# EAGLE board P007_AmanPandey_Headphone (EAGLE 9.6.2)
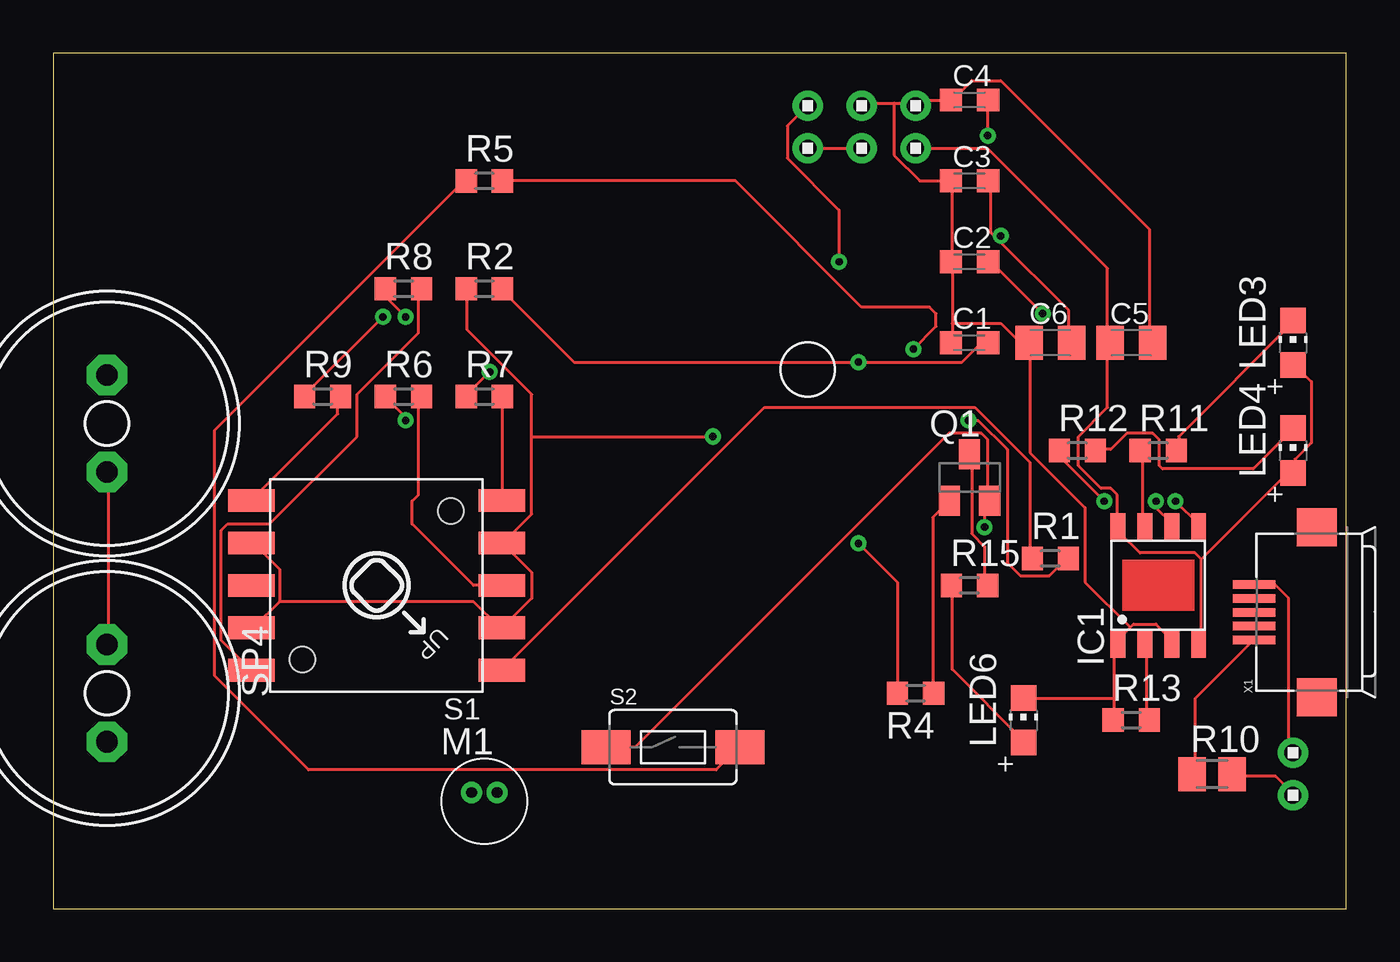
[diagram p0: board, top side]
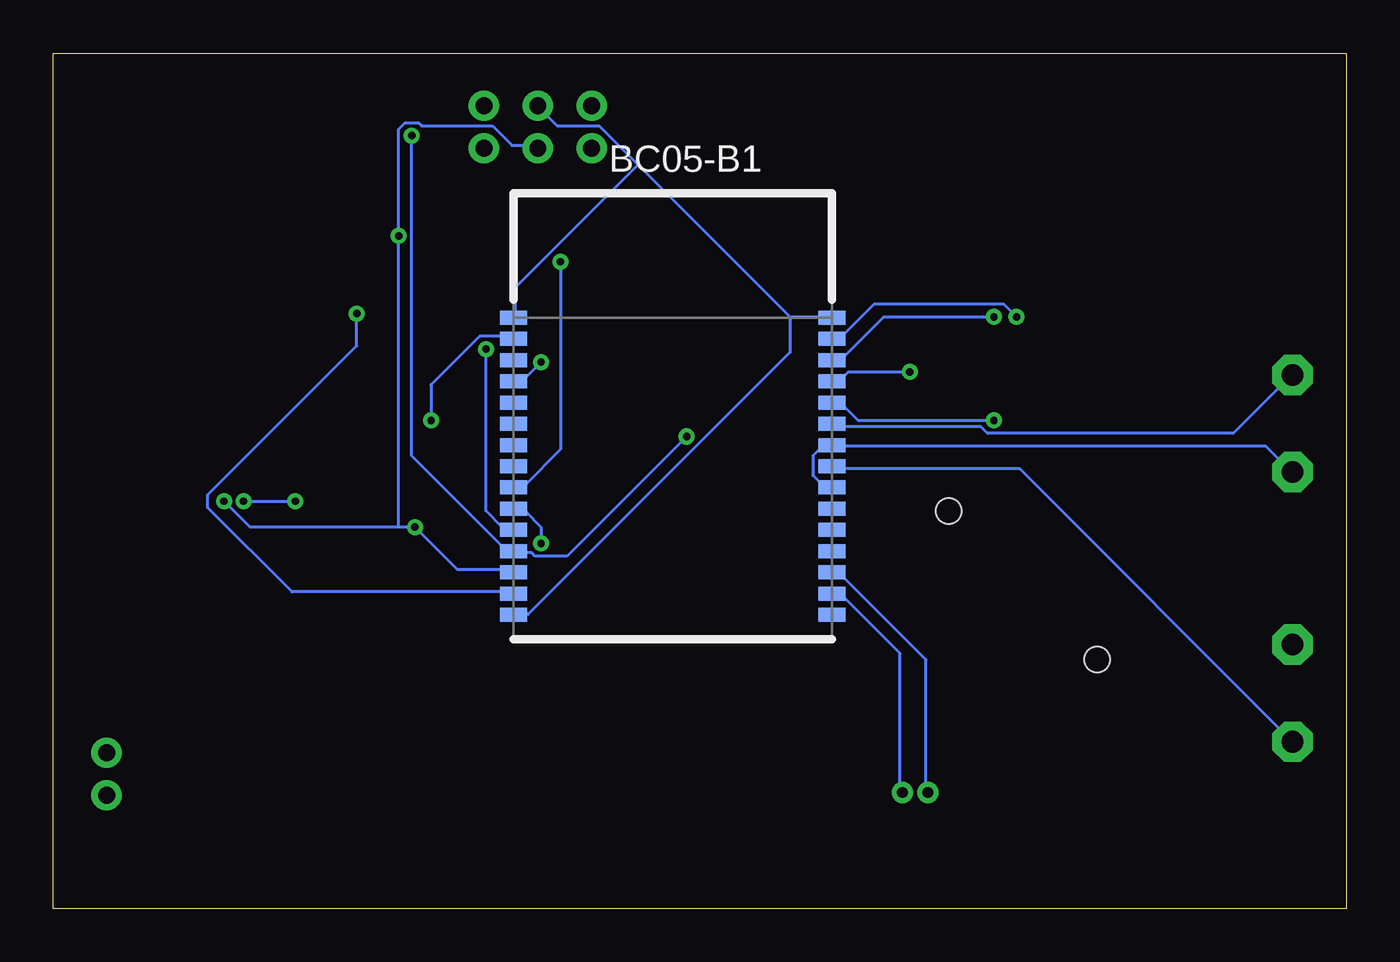
[diagram p1: board, bottom side, seen from below]

Size 60.94 x 40.31 mm. Coordinates in mm from the lower left corner, seen from the top.
Outline: 0,0 60.94,0 60.94,40.31 0,40.31 0,0
Copper layers (1*16): Top 0.035mm / dielectric 1.5mm / Bottom 0.035mm
Design rules "default": minimum track width 6mil, minimum drill 0.35mm, track to track 6mil, track to pad 6mil, pad to pad 6mil, via to via 6mil, smd to smd 6mil, copper to edge 40mil, drill to drill 6mil, minimum pad ring 10mil, minimum via ring 8mil, stop-mask expansion 4mil, vias tented up to drill 0mil, thermal gap 10mil

## Footprints (pad centres in the part's own frame; a part is rotated, then mirrored left to right if it is on the bottom)
BC05-B = smd 1.27 x 0.66 bottom: P$1 7.5,6.26; P$2 7.5,5.26; P$3 7.5,4.26; P$4 7.5,3.26; P$5 7.5,2.26; P$6 7.5,1.26; P$7 7.5,0.26; P$8 7.5,-0.74; P$9 7.5,-1.74; P$10 7.5,-2.74; P$11 7.5,-3.74; P$12 7.5,-4.74; P$13 7.5,-5.74; P$14 7.5,-6.74; P$15 7.5,-7.74; P$16 -7.5,-7.74; P$17 -7.5,-6.74; P$18 -7.5,-5.74; P$19 -7.5,-4.74; P$20 -7.5,-3.74; P$21 -7.5,-2.74; P$22 -7.5,-1.74; P$23 -7.5,-0.74; P$24 -7.5,0.26; P$25 -7.5,1.26; P$26 -7.5,2.26; P$27 -7.5,3.26; P$28 -7.5,4.26; P$29 -7.5,5.26; P$30 -7.5,6.26
C0603K = smd 1.05 x 1.08: 1 -0.875,0; 2 0.875,0
C0805K = smd 1.3 x 1.6: 1 -1,0; 2 1,0
SOP-8 = smd 1.3 x 0.7: 1 -2.75,1.905; 2 -2.75,0.635; 3 -2.75,-0.635; 4 -2.75,-1.905; 5 2.75,-1.905; 6 2.75,-0.635; 7 2.75,0.635; 8 2.75,1.905
CHIP-LED0805 = smd 1.2 x 1.2: A 0,-1.05; C 0,1.05
TOM-1545P-R = drill 0.5 pad 0.8: + 0.6,0.4; - -0.6,0.4
SOT23-BEC = smd 1 x 1.4: B -0.95,-1.1; C 0,1.1; E 0.95,-1.1
R0603 = smd 1 x 1.1: 1 -0.85,0; 2 0.85,0
M0805 = smd 1.3 x 1.6: 1 -0.95,0; 2 0.95,0
BUTTON = smd 2.184 x 1.067: A -5.9,4; B -5.9,-4; C 5.9,-4; D 5.9,4; E1 -5.9,0; E2 5.9,0; G1 -5.9,2; G2 -5.9,-2; G3 5.9,-2; G4 5.9,2 | hole 1.2: -3.5,-3.5; 3.5,3.5
TACTILE-SWITCH-1101NE = smd 2.3 x 1.6: P$1 -3.15,0; P$2 3.15,0
AL11P = drill 1.016 pad 1.905 octagon: + 2.286,0; - -2.286,0
1X2 = drill 0.8 pad 1.422: 1 -1,0; 2 1,0
USB-MICROB = smd 0.4 x 2: D+ 0,3.1; D- -0.65,3.1; GND 1.3,3.1; ID 0.65,3.1; VBUS -1.3,3.1 | smd 1.8 x 1.9: GND@2 -4,0.15; GND@3 4,0.15

## Placement (x,y rotation side)
BC05-B1  BC05-B  [BC05-B]  31.75,21.59 0 top
C1  104  [C0603K]  43.18,26.67 0 top
C2  475  [C0603K]  43.18,30.48 0 top
C3  475  [C0603K]  43.18,34.29 0 top
C4  475  [C0603K]  43.18,38.1 0 top
C5  10uF  [C0805K]  50.8,26.67 0 top
C6  10uF  [C0805K]  46.99,26.67 0 top
IC1  TP4056  [SOP-8]  52.07,15.24 90 top
LED3  RED  [CHIP-LED0805]  58.42,26.67 0 top
LED4  GREEN  [CHIP-LED0805]  58.42,21.59 0 top
LED6  Blue  [CHIP-LED0805]  45.72,8.89 0 top
M1  ELECTRET_MICROPHON-TOM-1545P-R  [TOM-1545P-R]  20.32,5.08 0 top
Q1  MMBT3906LT1SMD  [SOT23-BEC]  43.18,20.32 0 top
R1  10k  [R0603]  46.99,16.51 0 top
R2  10k  [R0603]  20.32,29.21 0 top
R4  1k  [R0603]  40.64,10.16 180 top
R5  10k  [R0603]  20.32,34.29 0 top
R6  10k  [R0603]  16.51,24.13 0 top
R7  10k  [R0603]  20.32,24.13 0 top
R8  10k  [R0603]  16.51,29.21 0 top
R9  10k  [R0603]  12.7,24.13 0 top
R10  0.5R  [M0805]  54.61,6.35 0 top
R11  1K  [R0603]  52.07,21.59 0 top
R12  1K  [R0603]  48.26,21.59 0 top
R13  5K  [R0603]  50.8,8.89 0 top
R15  47R  [R0603]  43.18,15.24 0 top
S1  BUTTON  [BUTTON]  15.24,15.24 180 top
S2  SWITCH-MOMENTARY-2-SMD-1101NE  [TACTILE-SWITCH-1101NE]  29.21,7.62 0 top
SP3  AL11P  [AL11P]  2.54,22.86 90 top
SP4  AL11P  [AL11P]  2.54,10.16 270 top
U$1  1X2  [1X2]  38.1,36.83 90 top
U$3  1X2  [1X2]  58.42,6.35 90 top
U$4  1X2  [1X2]  40.64,36.83 90 top
U$5  1X2  [1X2]  35.56,36.83 90 top
X1  USB-MICROB  [USB-MICROB]  59.69,13.97 90 top

## Library data of the parts
BC05-B1 S1 = ggaqquay
C1-C6 R1 R2 R4-R13 R15 = resistor
IC1 = TP4056
LED3 LED4 LED6 = adafruit
M1 = microphon
Q1 = transistor-pnp
S2 = SparkFun-Electromechanical
SP3 SP4 = buzzer; OC_FARNELL: unknown; OC_NEWARK: unknown
U$1 U$3-U$5 = headers(2mm)
X1 = SparkFun

## Nets
1.8V: BC05-B1.P$12 C4.2 R2.1 S1.G1 S1.G2 S1.G3 S1.G4
BLUE_LED: Q1.B R4.1
GND: BC05-B1.P$1 BC05-B1.P$15 BC05-B1.P$30 C1.1 C2.1 C3.1 C4.1 C5.2 C6.1 IC1.1 IC1.3 LED6.C R13.1 U$1.2 U$4.2
N$1: BC05-B1.P$2 R1.2
N$2: BC05-B1.P$4 C1.2 R2.2
N$3: BC05-B1.P$11 R5.2
N$4: BC05-B1.P$10 R4.2
N$6: BC05-B1.P$17 M1.+
N$7: BC05-B1.P$18 M1.-
N$8: BC05-B1.P$25 SP3.+
N$9: BC05-B1.P$29 R9.1
N$10: BC05-B1.P$28 R8.1
N$11: BC05-B1.P$27 R7.1
N$12: BC05-B1.P$26 R6.1
N$13: R7.2 S1.B
N$14: R8.2 S1.D
N$15: R6.2 S1.E1
N$16: R10.2 U$3.1
N$17: R1.1 S1.A
N$18: R5.1 S2.P$2
N$19: BC05-B1.P$23 SP4.+
N$20: BC05-B1.P$14 C2.2
N$21: BC05-B1.P$22 BC05-B1.P$24 SP3.- SP4.-
N$22: R10.1 X1.VBUS
N$23: C5.1 IC1.4 IC1.8 LED3.A LED4.A U$4.1
N$24: IC1.7 R11.1
N$25: LED3.C R11.2
N$26: LED4.C R12.2
N$27: IC1.6 R12.1
N$29: BC05-B1.P$21
N$30: IC1.2 R13.2
N$31: LED6.A R15.1
N$33: R9.2 S1.C
N$34: U$3.2 X1.GND
N$35: Q1.C R15.2
RED_LED: BC05-B1.P$9 U$5.2
VCC: BC05-B1.P$13 C3.2 C6.2 IC1.5 Q1.E S2.P$1 U$1.1 U$5.1

## Tracks (layer width: path | path; a pad name or v marks a point on that pad's centre or on a via)
1.8V  (via drill 0.35)
  Top 0.152: v44.04,36.42 44.04,38.1 C4.2 | 10.67,14.48 9.45,13.26 S1.G4 | 10.67,14.48 10.67,16 9.45,17.22 S1.G3 | 22.55,22.25 22.55,18.59 21.18,17.22 | 22.55,22.25 22.55,24.23 19.51,27.28 19.51,29.11 R2.1 | 21.18,17.22 22.55,15.85 22.55,14.63 21.18,13.26 S1.G1 21.03,13.26 19.81,14.48 10.67,14.48 | 21.18,17.22 S1.G2 | 22.55,22.25 v31.09,22.25
  Bottom 0.152: v44.04,36.42 44.04,21.34 39.62,16.92 39.32,16.92 BC05-B1.P$12 39.17,16.76 38.41,16.76 38.25,16.61 36.73,16.61 v31.09,22.25
BLUE_LED
  Top 0.152: R4.1 41.45,10.21 41.45,18.44 42.22,19.2 Q1.B
GND
  Top 0.152: 49.99,9.91 49.99,12.19 50.14,12.34 IC1.1 50.29,12.5 50.29,12.8 50.75,13.26 | 49.99,9.91 49.99,8.99 R13.1 | 49.99,9.91 45.72,9.91 LED6.C | 50.75,13.26 50.9,13.41 51.97,13.41 52.58,12.8 52.58,12.5 IC1.3 | 42.37,30.48 42.37,27.58 | 42.37,27.58 42.37,26.67 C1.1 | 42.37,30.48 42.37,34.29 C3.1 40.84,34.29 39.62,35.51 39.62,37.95 | 42.37,30.48 C2.1 | 42.37,27.58 44.65,27.58 45.57,26.67 C6.1 46.03,26.67 46.03,21.49 48.62,18.9 48.62,15.39 50.75,13.26 | C5.2 51.66,26.67 51.66,32 44.65,39.01 43.28,39.01 42.37,38.1 C4.1 40.84,38.1 40.69,37.95 U$4.2 40.54,37.95 39.62,37.95 | 39.62,37.95 38.1,37.95 U$1.2
  Bottom 0.152: 26.21,27.89 24.38,27.89 BC05-B1.P$30 | 33.38,35.05 35.2,36.88 37.19,36.88 38.1,37.8 U$1.2 | 33.38,35.05 26.21,27.89 | 26.21,27.89 26.21,26.21 38.56,13.87 39.17,13.87 BC05-B1.P$15 | 33.38,35.05 39.17,29.26 39.17,27.89 BC05-B1.P$1
N$1  (via drill 0.35)
  Top 0.152: v43.13,23.01 43.59,23.01 44.96,21.64 44.96,16.31 45.57,15.7 46.94,15.7 47.7,16.46 R1.2
  Bottom 0.152: v43.13,23.01 43.13,24.69 40.84,26.98 39.32,26.98 BC05-B1.P$2
N$2  (via drill 0.35)
  Top 0.152: C1.2 43.74,26.67 42.82,25.76 v37.95,25.76 24.54,25.76 21.18,29.11 R2.2
  Bottom 0.152: v37.95,25.76 38.71,24.99 39.17,24.99 BC05-B1.P$4
N$3  (via drill 0.35)
  Top 0.152: R5.2 32.16,34.29 38.1,28.35 41.3,28.35 41.6,28.04 41.6,27.43 v40.54,26.36
  Bottom 0.152: v40.54,26.36 40.54,18.75 39.78,17.98 39.32,17.98 BC05-B1.P$11
N$4  (via drill 0.35)
  Top 0.152: v37.95,17.22 39.78,15.39 39.78,10.21 R4.2
  Bottom 0.152: v37.95,17.22 37.95,17.98 38.71,18.75 39.17,18.75 BC05-B1.P$10
N$6
  Bottom 0.152: BC05-B1.P$17 24.23,14.78 23.77,14.78 21.03,12.04 21.03,5.49 M1.+
N$7
  Bottom 0.152: BC05-B1.P$18 24.23,15.85 23.93,15.85 19.81,11.73 19.81,5.49 M1.-
N$8
  Bottom 0.152: BC05-B1.P$25 24.23,22.71 17.22,22.71 16.92,22.4 5.33,22.4 2.59,25.15 SP3.+
N$9  (via drill 0.35)
  Top 0.152: v15.55,27.89 11.89,24.23 R9.1
  Bottom 0.152: v15.55,27.89 16.15,28.5 22.25,28.5 23.77,26.98 24.23,26.98 BC05-B1.P$29
N$10  (via drill 0.35)
  Top 0.152: v16.61,27.89 15.7,28.8 15.7,29.11 R8.1
  Bottom 0.152: v16.61,27.89 21.79,27.89 23.77,25.91 24.23,25.91 BC05-B1.P$28
N$11  (via drill 0.35)
  Top 0.152: v20.57,25.3 19.51,24.23 R7.1
  Bottom 0.152: v20.57,25.3 23.47,25.3 23.77,24.99 24.23,24.99 BC05-B1.P$27
N$12  (via drill 0.35)
  Top 0.152: v16.61,23.01 16.61,23.16 15.7,24.08 R6.1
  Bottom 0.152: v16.61,23.01 23.01,23.01 23.77,23.77 24.23,23.77 BC05-B1.P$26
N$13
  Top 0.152: R7.2 21.18,24.08 21.18,19.36 S1.B
N$14
  Top 0.152: R8.2 17.22,29.11 17.22,27.13 14.33,24.23 14.33,22.25 10.21,18.14 8.23,18.14 7.92,17.83 7.92,12.65 9.3,11.28 S1.D
N$15
  Top 0.152: S1.E1 19.81,15.24 16.92,18.14 16.92,19.2 17.22,19.51 17.22,24.08 R6.2
N$16
  Top 0.152: R10.2 55.63,6.25 57.61,6.25 58.37,5.49 U$3.1
N$17
  Top 0.152: R1.1 46.03,16.61 46.03,21.03 43.43,23.62 33.53,23.62 21.18,11.28 S1.A
N$18
  Top 0.152: R5.1 19.36,34.29 7.62,22.55 7.62,10.97 12.04,6.55 31.24,6.55 32.31,7.62 S2.P$2
N$19
  Bottom 0.152: SP4.+ 15.39,20.73 24.23,20.73 BC05-B1.P$23
N$20  (via drill 0.35)
  Top 0.152: v46.63,28.04 44.2,30.48 C2.2
  Bottom 0.152: v46.63,28.04 46.63,26.52 53.65,19.51 53.65,18.9 49.68,14.94 39.32,14.94 BC05-B1.P$14
N$21
  Top 0.152: SP4.- 2.59,12.5 2.59,20.57 SP3.-
  Bottom 0.152: BC05-B1.P$22 24.38,19.96 24.69,19.96 25.15,20.42 25.15,21.34 24.69,21.79 24.38,21.79 BC05-B1.P$24 24.23,21.79 3.81,21.79 2.59,20.57 SP3.-
N$22
  Top 0.152: R10.1 53.8,6.4 53.8,9.91 56.54,12.65 X1.VBUS
N$23
  Top 0.152: LED3.A 58.52,25.6 59.28,24.84 59.28,21.95 58.52,21.18 58.52,20.57 LED4.A 58.37,20.42 58.06,20.42 54.1,16.46 | 54.1,16.46 53.8,16.76 51.21,16.76 50.29,17.68 50.29,17.98 IC1.8 50.14,18.14 50.14,19.51 49.84,19.81 49.38,19.81 48.31,20.88 48.31,22.25 49.68,23.62 49.68,26.67 | 54.1,16.46 54.1,12.5 IC1.4 | 49.68,26.67 49.68,30.18 44.04,35.81 40.69,35.81 U$4.1 | 49.68,26.67 C5.1
N$24
  Top 0.152: R11.1 51.36,21.49 51.36,18.14 IC1.7
N$25
  Top 0.152: R11.2 53.03,21.64 53.03,22.25 58.37,27.58 LED3.C
N$26
  Top 0.152: R12.2 49.22,21.64 49.84,21.64 50.6,22.4 51.82,22.4 52.12,22.1 52.12,20.88 52.27,20.73 56.54,20.73 58.37,22.55 LED4.C
N$27  (via drill 0.35)
  Top 0.152: v49.53,19.2 47.55,21.18 47.55,21.49 R12.1 | v51.97,19.2 51.97,18.9 52.73,18.14 IC1.6
  Bottom 0.152: v51.97,19.2 v49.53,19.2
N$30
  Top 0.152: R13.2 51.51,8.99 51.51,12.34 IC1.2
N$31
  Top 0.152: R15.1 42.37,15.24 42.37,11.28 45.72,7.92 LED6.A
N$33
  Top 0.152: R9.2 13.41,24.08 13.41,23.32 9.45,19.36 S1.C
N$34
  Top 0.152: X1.GND 56.69,15.24 57.61,15.24 58.22,14.63 58.22,7.62 58.37,7.47 U$3.2
N$35
  Top 0.152: R15.2 43.89,15.24 43.89,17.07 43.28,17.68 43.28,21.34 Q1.C
RED_LED  (via drill 0.35)
  Top 0.152: v37.03,30.48 37.03,32.92 34.59,35.36 34.59,36.88 35.51,37.8 U$5.2
  Bottom 0.152: v37.03,30.48 37.03,21.64 38.71,19.96 39.17,19.96 BC05-B1.P$9
VCC  (via drill 0.35)
  Top 0.152: 44.5,31.55 47.85,28.19 47.85,26.67 C6.2 | 44.5,31.55 44.2,31.85 44.2,34.29 C3.2 | U$5.1 35.66,35.81 38.1,35.81 U$1.1 | v43.89,17.98 43.89,19.05 44.04,19.2 Q1.E 44.04,19.36 44.04,22.1 43.74,22.4 42.22,22.4 27.43,7.62 S2.P$1 | v52.88,19.2 53.95,18.14 IC1.5 | v44.65,31.7 44.5,31.55
  Bottom 0.152: BC05-B1.P$13 39.32,16 41.91,16 v43.89,17.98 44.65,17.98 | v52.88,19.2 51.66,17.98 44.65,17.98 | 44.65,17.98 v44.65,31.7 44.65,36.73 44.35,37.03 43.74,37.03 43.59,36.88 40.23,36.88 39.32,35.97 38.1,35.97 U$1.1